# Altium PCB PCB1.PcbDoc
Units mm, origin at the board's own origin, x right, y up, seen from the top; angles counter-clockwise.
Board outline 30 x 15 mm, 2 copper layers (Top Layer, Bottom Layer); 22 components, 12 nets, 50 pads, 0 vias.
Unrouted connection lines stored in the file: 5.
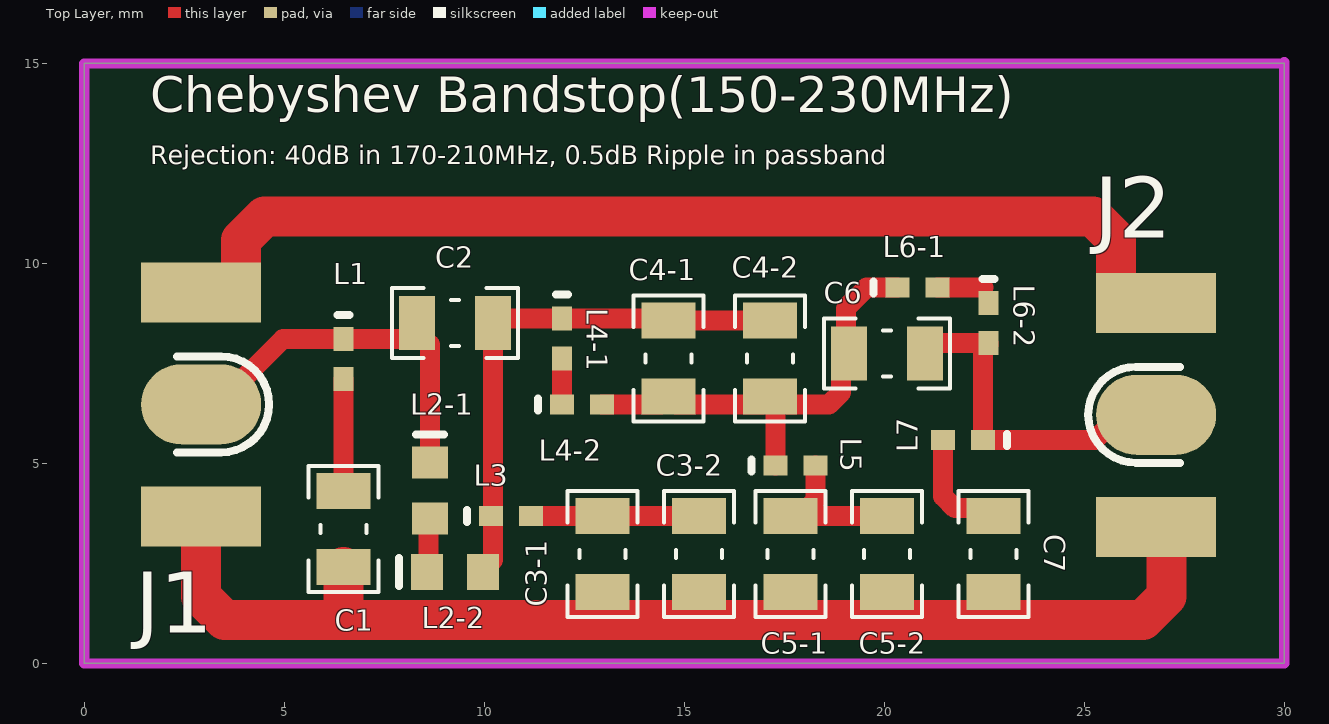
[diagram p0: Top Layer view]
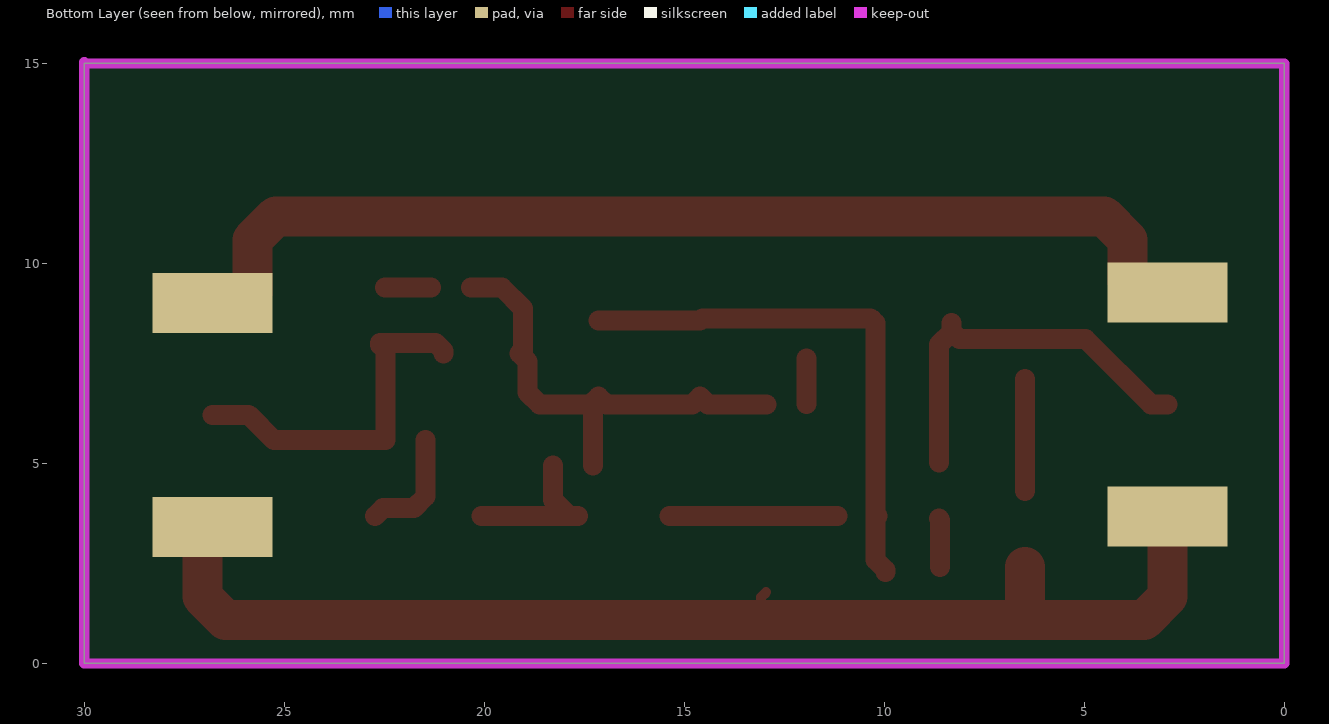
[diagram p1: Bottom Layer view, seen from below]
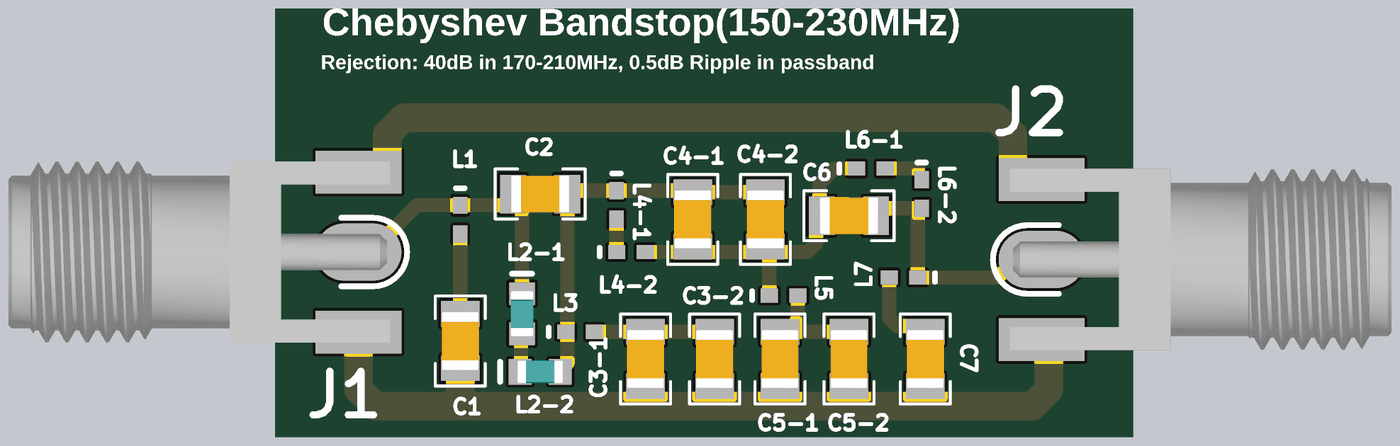
[diagram p2: 3D render of the assembled board from above, using the file's embedded part models]

## Layer stack, top to bottom
Top Solder: solder mask 0.0102, Solder Resist, Dk 3.5
Top Layer: signal copper 0.0356
Dielectric 1: dielectric 0.32, FR-4, Dk 4.8
Bottom Layer: signal copper 0.0356
Bottom Solder: solder mask 0.0102, Solder Resist, Dk 3.5

## Board outline
0,0 30,0 30,15 0,15

## Design rules (kind name [scope] priority, off if disabled: settings)
Clearance [All] p1: gap=0.254 ignorepadtopadclearanceinfootprint=FALSE except(0: Arc-Hole Track-Hole SMDPad-Hole THPad-Hole Via-Hole Fill-Hole Poly-Hole Region-Hole Text-Hole)
PolygonConnect [All] p1: connectstyle=Relief reliefconductorwidth=0.254 reliefentries=4 polygonreliefangle="90 Angle" airgapwidth=0.254
RoutingVias [All] p1: holewidth=0.711 width=1.27 viastyle="Through Hole" minholewidth=0.711 minwidth=1.27 maxholewidth=0.711 maxwidth=1.27
SolderMaskExpansion [All] p1: expansion=0.102 istentingtop=FALSE
Width [All] p1: maxlimit=1 minlimit=0.254 preferedwidth=0.5 bottomlayer_maxwidth=0.254 bottomlayer_prefwidth=0.254 minimp=50.000000 maximp=50.000000 favimp=50.000000
30 further rules are at their usual default settings.

## Components (designator, comment, footprint, x,y, rotation, side; value= is the part's Value field where it differs from the comment)
C1 "12pF" CAP0805 6.477,3.363 r90 top value=100nF
C2 "33pF" CAP0805 9.271,8.509 r180 top value=100nF
C3-1 "18pF" CAP0805 12.954,2.733 r90 top value=100nF
C3-2 "1.5pF" CAP0805 15.367,2.733 r90 top value=100nF
C4-1 "27pF" CAP0805 14.605,7.62 r90 top value=100nF
C4-2 "2.2pF" CAP0805 17.145,7.62 r90 top value=100nF
C5-1 "18pF" CAP0805 17.653,2.733 r90 top value=100nF
C5-2 "1.5pF" CAP0805 20.066,2.733 r90 top value=100nF
C6 "33pF" CAP0805 20.066,7.747 r180 top value=100nF
C7 "12pF" CAP0805 22.733,2.733 r90 top value=100nF
J1 "SMA" SMA_EM 2.921,6.477 r90 top
J2 "SMA" SMA_EM 26.797,6.217 r270 top
L1 "Inductor" 0402-A 6.477,7.612 r270 top value=56nH
L2-1 "Inductor" INDC1608L 8.636,4.318 r270 top value=18nH
L2-2 "Inductor" INDC1608L 9.271,2.286 r0 top value=4.7nH
L3 "Inductor" 0402-A 10.668,3.683 r0 top value=39nH
L4-1 "Inductor" 0402-A 11.938,8.128 r270 top value=22nH
L4-2 "Inductor" 0402-A 12.446,6.477 r0 top value=2.7nH
L5 "Inductor" 0402-A 17.78,4.953 r0 top value=39nH
L6-1 "Inductor" 0402-A 20.828,9.398 r0 top value=18nH
L6-2 "Inductor" 0402-A 22.606,8.509 r270 top value=4.7nH
L7 "Inductor" 0402-A 21.971,5.588 r180 top value=56nH

## Footprints (in the part's own frame and the unit in brackets; to place one, negate y for a bottom-side part, rotate by r counter-clockwise, add the part's x,y. Pads: shape width x height; smd on the part's side, far side on the other; paste and mask are expansions set on the pad)
0402-A [mm] "Chip Inductor, Body 1.0x0.5mm, IPC High Density"
  rect 0.6x0.5 smd: 1(-0.5,0) 2(0.5,0)
  silkscreen extent -1.1,-0.15 -1.1,0.15, body extent -0.55,-0.3 0.55,0.3, height 0.55
CAP0805 [mm] "Chip Capacitor, 2-Leads, Body 2/00x1/25mm, IPC Medium Density DESIGNER:ABBAS BASEREH"
  rect 0.9x1.35 smd: 1(-0.95,0) 2(0.95,0)
  silkscreen extent -1.58,-0.87 1.58,0.87, body extent -1.02,-0.65 1.02,0.65, height 0.5
INDC1608L [mm] "Chip Inductor, Body 1.6x0.8mm, IPC High Density"
  rect 0.8x0.9 smd: 1(-0.7,0) 2(0.7,0)
  silkscreen extent -1.4,-0.35 -1.4,0.35, body extent -0.8,-0.4 0.8,0.4, height 0.95
SMA_EM [mm] "SMA-J-P-H-ST-EM1 edge mounting"
  oval 2x3 smd: 1(0,0)
  rect 1.5x3 smd: 2(-2.8,0) 3(2.8,0)
  rect 1.5x3 smd far side: 4(-2.8,0) 5(2.8,0)
  silkscreen extent -1.2,-1.7 1.2,0.6, body extent -3.17,-1.1 3.17,12.23, height 3.51

## Part data
C1 C2 C3-1 C3-2 C4-1 C4-2 C5-1 C5-2 C6 C7: library part "CAP SMD PACKAGE", "TOTAL CAPACITOR SMD PACK", Data=2017-3-10, Desc.="CAP SMD TOTAL PACKAGES", Designer="Abbas Basereh"
J1 J2: library part CONN_RF_SMA_EM, "CONN, RF, SMA, Edge mounting", ASSEMBLY=ASSEMBLY, DESC=DESCRIPTION, DIST#=DIGIKEY, MANF=Samtec, MANF_P#=SMA-J-P-H-ST-EM1, PARAM="50Ohm, 20GHz", PARAM2=GOLD, Price=4.3$
L1 L2-1 L2-2 L3 L4-1 L4-2 L5 L6-1 L6-2 L7: Code_IEC=1005, Code_JEITA=0402, LatestRevisionDate=29-May-2009, LatestRevisionNote="IPC-7351 Footprint Added.", PackageDescription="Chip Inductor", PackageReference=0402-A, Published=8-Jun-2000, Publisher="Altium Limited"

## Nets (pads, with @x,y where several pads share a name; then routed paths per layer and width w, separated by ;. In a path a pad name is that pad's centre, name@x,y a point inside that pad or via, vN(x,y) a via of type N, cw(c..) or ccw(c..) an arc to the next point about the centre after c; other vN are vias at no path point)
GND: C1.1 C3-1.1 C3-2.1 C5-1.1 C5-2.1 C7.1 J1.2 J1.3 J1.4 J1.5 J2.2 J2.3 J2.4 J2.5 | length 58.6
  Top Layer w0.254: C3-1.1 13.081,1.656 13.081,1.082
  Top Layer w1: J1.2 2.921,1.668 3.507,1.082 6.477,1.082 ; J1.3 3.671,9.277 3.921,9.527 3.921,10.59 4.507,11.176 25.211,11.176 25.797,10.59 25.797,9.267 26.045,9.019 J2.2@27.545,9.019 ; C1.1 6.477,1.082 ; J2.3 J2.3@27.047,3.667 ; J2.3@26.801,3.417 27.051,3.167 27.051,1.668 26.465,1.082 13.081,1.082 6.477,1.082
NetC1_2: C1.2 L1.2 | length 2.8
  Top Layer w0.5: C1.2 L1.2
NetC2_1: C2.1 C4-1.2 C4-2.2 L2-2.2 L3.1 L4-1.1 | length 13.4
  Top Layer w0.5: L2-2.2 9.971,2.336 10.221,2.586 10.221,3.683 C2.1 10.34,8.628 L4-1.1 14.547,8.628 C4-1.2 C4-2.2 ; L3.1 L3.1@10.195,3.683
NetC2_2: C2.2 J1.1 L1.1 L2-1.1 | length 10
  Top Layer w0.5: J1.1 3.334,6.477 4.969,8.112 8.121,8.112 8.321,8.312 C2.2 8.321,8.284 8.636,7.969 L2-1.1
NetC3-1_2: C3-1.2 C3-2.2 L3.2 | length 4.2
  Top Layer w0.5: L3.2 11.529,3.683 C3-1.2 C3-2.2
NetC4-1_1: C4-1.1 C4-2.1 C6.2 L4-2.2 L5.1 L6-1.1 | length 11.7
  Top Layer w0.5: L4-2.2 14.412,6.477 C4-1.1 14.798,6.477 16.952,6.477 C4-2.1 17.338,6.477 18.623,6.477 18.916,6.77 18.916,7.547 C6.2 19.039,7.824 19.039,8.879 19.558,9.398 L6-1.1 ; L5.1 C4-2.1@17.28,6.535
NetC5-1_2: C5-1.2 C5-2.2 L5.2 | length 3.8
  Top Layer w0.5: C5-1.2 C5-1.2@17.878,3.683 ; L5.2 18.28,4.085 C5-1.2@17.878,3.683 ; C5-2.2 C5-1.2@17.878,3.683
NetC6_1: C6.1 J2.1 L6-2.2 L7.1 | length 8.8
  Top Layer w0.5: C6.1 21.016,7.809 21.216,8.009 L6-2.2 22.606,7.959 22.471,7.824 L7.1 25.262,5.588 25.891,6.217 J2.1
NetC7_2: C7.2 L7.2 | length 2.9
  Top Layer w0.5: L7.2 21.471,4.176 21.764,3.883 22.533,3.883 C7.2
NetL2-1_2: L2-1.2 L2-2.1 | length 1.2
  Top Layer w0.5: L2-2.1@8.604,2.413 8.604,3.585 L2-1.2
NetL4-1_2: L4-1.2 L4-2.1 | length 1.2
  Top Layer w0.254: L4-1.2 L4-1.2@11.942,7.624 ; L4-2.1@11.942,6.481 L4-2.1
  Top Layer w0.5: L4-2.1@11.942,6.481 L4-1.2@11.942,7.624
NetL6-1_2: L6-1.2 L6-2.1 | length 1.2
  Top Layer w0.5: L6-1.2 21.378,9.398 22.479,9.398

## Keep-outs
Keep-Out Layer:
  lines w0.254: 30,0 0,0 0,15 30,15 ; 30,0.028 30,15.028

## Silkscreen, mask and mechanical layers (free items; w line width, h text height)
Top Overlay:
  text "Chebyshev Bandstop(150-230MHz)" at 1.651,13.485 h1.52
  text "Rejection: 40dB in 170-210MHz, 0.5dB Ripple in passband" at 1.651,12.319 h0.8